# Altium PCB Street_light_driver_30W.PcbDoc
Units mm, origin at the board's own origin, x right, y up, seen from the top; angles counter-clockwise.
Board outline 30 x 124 mm, 2 copper layers (Top Layer, Bottom Layer); 27 components, 14 nets, 67 pads, 0 vias.
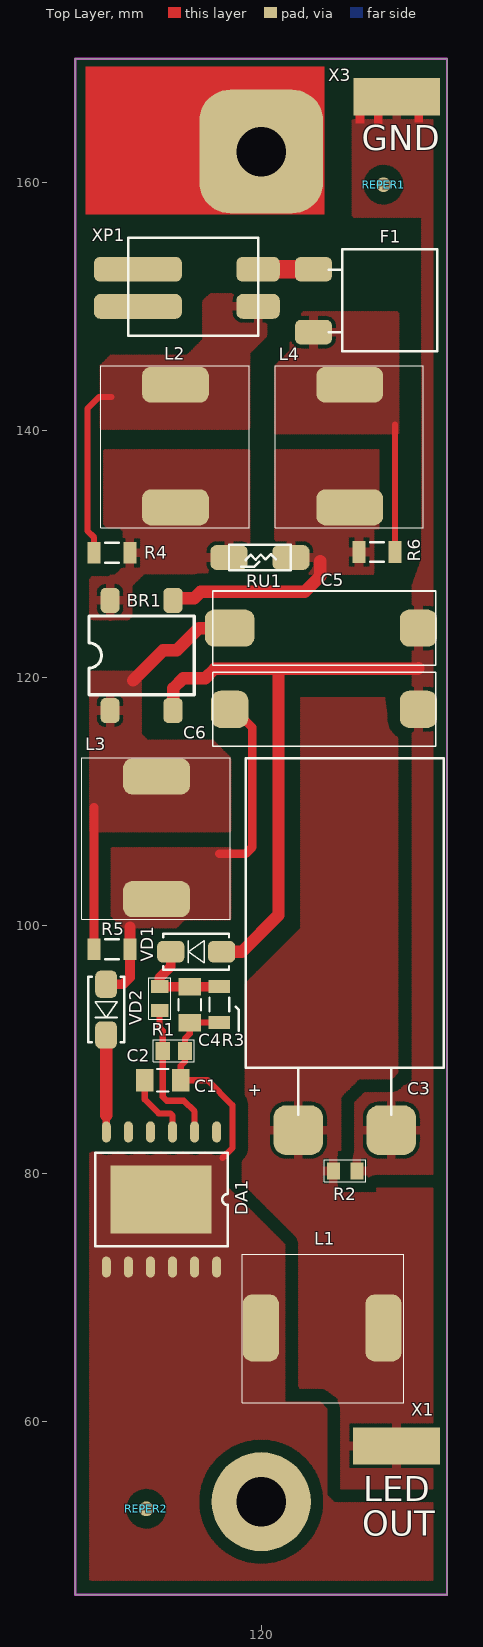
[diagram p0: Top Layer view]
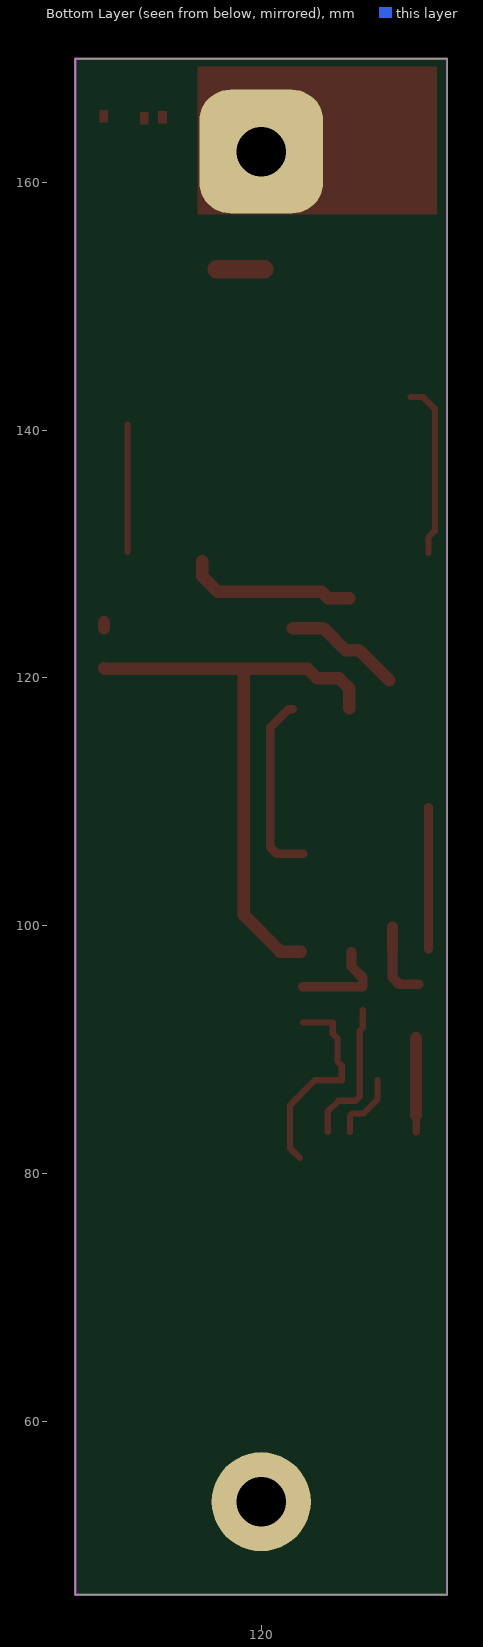
[diagram p1: Bottom Layer view, seen from below]

## Layer stack, top to bottom
Top Solder: solder mask 0.0102, Solder Resist, Dk 3.5
Top Layer: signal copper 0.0356
Dielectric 1: dielectric 0.32, FR-4, Dk 4.8
Bottom Layer: signal copper 0.0356
Bottom Solder: solder mask 0.0102, Solder Resist, Dk 3.5

## Board outline
105,46 135,46 135,170 105,170

## Design rules (kind name [scope] priority, off if disabled: settings)
Clearance Clearance_1 [InPolygon] p1: gap=1
Clearance [All] p2: gap=0.3
PolygonConnect PolygonConnect_1 [InComponent('DA1') OR InComponent('L1') OR InComponent('L2') OR InComponent('L3') OR InComponent('L4')] p1: connectstyle=Direct reliefconductorwidth=0.254 reliefentries=4 polygonreliefangle="90 Angle" airgapwidth=0.254
PolygonConnect [All] p2: connectstyle=Relief reliefconductorwidth=0.7 reliefentries=4 polygonreliefangle="90 Angle" airgapwidth=0.3
RoutingVias [All] p1: holewidth=0.711 width=1.27 viastyle="Through Hole" minholewidth=0.711 minwidth=1.27 maxholewidth=0.711 maxwidth=1.27
SolderMaskExpansion [All] p1: expansion=0.102
Width [All] p1: maxlimit=3 minlimit=0.2 preferedwidth=0.5
30 further rules are at their usual default settings.

## Classes and differential pairs
component class ICS: C1 C2 C3 C4 DA1 L1 R1 R2 R3 VD1 X1 X3
component class Main: BR1 C5 C6 F1 L2 L3 L4 R4 R5 R6 REPER1 REPER2 RU1 VD2 XP1

## Components (designator, comment, footprint, x,y, rotation, side; value= is the part's Value field where it differs from the comment)
BR1 "DF10S" SDIP 107.8,117.375 r180 top
C1 "10uF" CC1206 112.05,87.525 r180 top
C2 "1uF" CC0805 112.95,89.9 r0 top
C3 "470uFx100V" CAP_7.5_SMD_2 127.05,101.225 r0 top
C4 "10uF" CC1206 114.225,93.625 r270 top
C5 "100nFx630V" CAP_630V_SMD#1 125.275,124.1 r180 top
C6 "100nFx630V" CAP_630V_SMD#2 125.275,117.55 r180 top
DA1 "LNK460KG" eSOP-12 111.85,77.675 r270 top
F1 "*" "Fuse Belfuse" 124.2,150.55 r270 top
L1 "CDRH129HF-331MC" IND_CDRH129 125.55,67.675 r270 top
L2 "CDRH129HF-102MC" IND_CDRH129 113.225,138.1 r180 top
L3 "CDRH129HF-102MC" IND_CDRH129 111.7,106.475 r180 top
L4 "CDRH129HF-102MC" IND_CDRH129 127.3,138.1 r180 top
R1 "3k3" RC0805 111.8,94.125 r90 top
R2 "100k" RC0805 126.775,80.2 r180 top
R3 "1E2" RC1206 116.625,93.625 r270 top
R4 "3k3" RC1206 107.95,130.1 r0 top
R5 "3k6" RC1206 107.95,98.1 r0 top
R6 "3k3" RC1206 129.35,130.175 r180 top
REPER1 "REPER1.2" REPER1.2 129.875,159.825 r90 top
REPER2 "REPER1.2" REPER1.2 110.725,52.925 r90 top
RU1 "KLS6-07D" Varistor_7mm_SMD 120.025,129.8 r270 top
VD1 "ES1J" SMA 114.75,97.9 r180 top
VD2 "ES1J" SMA 107.475,93.225 r270 top
X1 "PIN_7x3mm_SMD" PIN_7x3mm_SMD 130.925,58 r0 top
X3 "PIN_7x3mm_SMD" PIN_7x3mm_SMD 130.95,166.925 r0 top
XP1 "*" "Poke-In 2pin" 110.05,153 r0 top

## Footprints (in the part's own frame and the unit in brackets; to place one, negate y for a bottom-side part, rotate by r counter-clockwise, add the part's x,y. Pads: shape width x height; smd on the part's side, far side on the other; paste and mask are expansions set on the pad)
CAP_7.5_SMD_2 [mm]
  rrect50% 4x4 smd: 1(3.45,-17.725) 2(-4.05,-17.725)
  silkscreen extent -8.3,-16.47 7.7,12.3
CAP_630V_SMD#1 [mm]
  rrect50% 3x3 smd: 1(-7.42,0.075)
  rrect50% 4x3 smd: 2(7.82,0.075)
  silkscreen extent -8.8,-2.92 9.2,3.08
CAP_630V_SMD#2 [mm]
  rrect50% 3x3 smd: 1(-7.42,0.075) 2(7.82,0.075)
  silkscreen extent -8.8,-2.92 9.2,3.08
CC0805 [mm]
  rect 1.15x1.45 smd paste-25.4: 1(-0.9,0) 2(0.9,0)
  silkscreen extent -1.65,-0.9 1.65,0.9
CC1206 [mm]
  rect 1.4x1.8 smd paste-25.4: 1(-1.45,0) 2(1.45,0)
  silkscreen extent -0.45,-0.9 0.45,0.9
eSOP-12 [mm]
  oval 1.7x0.71 smd: 1(-5.675,4.55) 2(-5.675,2.77) 3(-5.675,0.99) 4(-5.675,-0.79) 5(-5.675,-2.57) 6(-5.675,-4.35) 7(5.225,-4.35) 8(5.225,-2.57) 9(5.225,-0.79) 10(5.225,0.99) 11(5.225,2.77) 12(5.225,4.55)
  rect 5.51x8.15 smd: 13(-0.225,0.075)
  silkscreen extent -3.99,-5.24 3.54,5.44, body extent -4,-5.25 3.52,5.45, height 2.3
"Fuse Belfuse" [mm]
  rrect50% 2x3 smd: 1(-2.45,0.025) 2(2.63,0.025)
  silkscreen extent -4.08,1.25 4.18,10.02
IND_CDRH129 [mm]
  rrect50% 5.4x2.9 smd: 1(0.15,-5.575) 2(0.15,4.325)
  silkscreen extent -5.8,-7.1 6.17,5.95
PIN_7x3mm_SMD [mm]
  rect 7x3 smd: 1(0,0)
"Poke-In 2pin" [mm]
  rrect50% 7.1x2 smd: 1(0,0) 2(0,-3)
  rrect50% 3.5x2 smd: 3(9.7,-3) 4(9.7,0)
  silkscreen extent -0.77,-5.38 9.72,2.53
RC0805 [mm]
  rect 1.05x1.4 smd paste-25.4: 1(-0.95,0) 2(0.95,0)
  silkscreen extent -1.67,-0.89 1.67,0.89
RC1206 [mm]
  rect 1.05x1.75 smd paste-25.4: 1(-1.45,0) 2(1.45,0)
  silkscreen extent -0.55,-0.8 0.55,0.8
REPER1.2 [mm]
  round 1.2 smd paste-25.4 mask-25.4: 1(0,0)
  Top Layer pour cut-out: -1.2,-1.2 1.2,-1.2 1.2,1.2 -1.2,1.2
SDIP [mil]
  rrect50% 60x80 smd: 1(0,0) 2(-200,0) 3(-200,-350) 4(0,-350)
  silkscreen extent -268,-300 68,-50
SMA [mm]
  rrect50% 2.2x1.75 smd: 1(-2.05,0) 2(2.05,0)
  silkscreen extent -2.65,-1.45 2.65,1.45
Varistor_7mm_SMD [mm]
  rrect50% 2x3 smd: 1(0.075,2.375) 2(0.075,-2.625)
  silkscreen extent -0.95,-2.63 1.1,2.37

## Part data
C1 C4: library part CC1206, "CC1206"
C2: library part CC0805, "CC0805"
C3: library part CAP_16x25
C5 C6: library part Cap_HV
F1: library part "Fuse Belufse"
L1 L2 L3 L4: library part CDRH129
R1 R2: library part RC0805, "RC0805"
R3 R4 R5 R6: library part RC1206, "RC1206"
VD1 VD2: library part SS14, "Schottky Rectifier"
XP1: library part "Poke-IN 2Pin"

## Free pads (board coordinates)
  round 8 hole 4 unplated: 0(120,53.5)
  rrect50% 10x10 hole 4 unplated: 0(120,162.5)

## Nets (pads, with @x,y where several pads share a name; then routed paths per layer and width w, separated by ;. In a path a pad name is that pad's centre, name@x,y a point inside that pad or via, vN(x,y) a via of type N, cw(c..) or ccw(c..) an arc to the next point about the centre after c; other vN are vias at no path point)
GND: BR1.2 C3.1 C5.1 C6.1 R2.1 VD1.1 X3.1 | length 48.2
  Top Layer w1: BR1.2@112.9,117.56 112.9,119.175 113.7,119.975 115.475,119.975 116.25,120.75 132.645,120.75 132.695,120.8 ; VD1.1 118.45,97.9 121.4,100.85 121.4,120.625 ; C5.1 C5.1@132.695,124.5
NetBR1_1: BR1.1 C5.2 L3.1 R5.1 | length 21
  Top Layer w0.7: R5.1 106.5,109.575
  Top Layer w1: 109.65,119.8 112.075,122.225 113.175,122.225 114.975,124.025 C5.2
NetBR1_3: BR1.3 L4.2 R6.2 RU1.1 | length 13.8
  Top Layer w1: BR1.3@112.9,126.45 114.6,126.45 115.1,126.95 123.5,126.95 124.775,128.225 124.775,129.45
NetBR1_4: BR1.4 L2.2 R4.2 RU1.2
NetC1_1: C1.1 C2.2 C4.2 DA1.7 DA1.8 DA1.9 DA1.10 DA1.11 DA1.12 DA1.13 L1.1 R3.2 | length 17
  Top Layer w0.5: R3.2 C4.2 114.225,91.275 113.85,90.9 C2.2 113.85,89.05 113.5,88.7 C1.1 115.675,87.525 117.675,85.525 117.675,82.05 116.875,81.25
NetC1_2: C1.2 DA1.3 | length 5.6
  Top Layer w0.5: C1.2 110.6,85.975 111.725,84.85 112.65,84.85 112.84,84.66 DA1.3
NetC2_1: C2.1 DA1.2 R1.1 | length 11.8
  Top Layer w0.5: R1.1 111.8,91.775 112.05,91.525 C2.1 112.05,86.2 112.375,85.875 113.75,85.875 114.62,85.005 DA1.2
NetC3_2: C3.2 L1.2 R2.2 X1.1
NetC4_1: C4.1 R1.2 R3.1 VD1.2 | length 8
  Top Layer w0.8: VD1.2 112.7,96.7 111.8,95.8 R1.2 C4.1 R3.1
NetC6_2: C6.2 L3.2 R5.2 VD2.1 | length 21.4
  Top Layer w0.7: 116.6,105.8 118.75,105.8 119.275,106.325 119.275,116 117.8,117.475 C6.2
  Top Layer w0.8: VD2.1@107.3,95.275 108.85,95.275 109.4,95.825 R5.2
  Top Layer w0.9: R5.2 109.4,99.875
NetDA1_6: DA1.6 VD2.2 | length 8.6
  Top Layer w0.6: DA1.6 107.5,85.75
  Top Layer w1: 107.5,84.7 VD2.2@107.5,90.9
NetF1_1: F1.1 XP1.4 | length 3.8
  Top Layer w1.5: XP1.4 F1.1@123.6,153
NetF1_2: F1.2 L4.1 R6.1 | length 10.3
  Top Layer w0.5: R6.1 130.8,140.45
NetL2_1: L2.1 R4.1 XP1.3 | length 14.2
  Top Layer w0.5: R4.1 106.5,131.35 105.975,131.875 105.975,141.75 106.9,142.675 107.925,142.675
pads on no net: DA1.1 DA1.4 DA1.5 REPER1.1 REPER2.1 XP1.1 XP1.2

## Polygon pours and split planes (outlines as drawn)
NetF1_2 on Top Layer "NETF1_2_L01_P000" (hatched 90Degree grid 0.15 track 0.2, remove dead copper, pour order 0): 122.375,148.25 122.375,146.3 122.275,146.3 121.175,145.2 121.125,145.15 121.125,139.75 131.05,139.75 131.05,141.425 131.05,146.3 131.05,148.675 131.05,149.525 123.4,149.525
NetL2_1 on Top Layer "NETL2_1_L01_P002" (hatched 90Degree grid 0.15 track 0.2, remove dead copper, pour order 2): 120.425,150.975 115.9,150.975 115.4,150.475 115.325,150.4 115.325,147.65 115.325,147.3 114.5,146.475 114.025,146 109.175,146 107.85,146 107.05,145.2 107.05,140.875 107.05,140.125 119.025,140.125 119.025,145.2 119.025,146.25 120.425,147.65 120.425,149.8
NetBR1_4 on Top Layer "NETBR1_4_L01_P004" (hatched 90Degree grid 0.15 track 0.2, remove dead copper, pour order 4): 107.05,138.375 119.025,138.375 119.025,132.15 119.025,129.1 118.375,128.45 114.95,128.45 110.5,128.45 109.75,127.7 109.5,127.45 109.5,125.775 109.5,125 109.25,124.75 106.75,124.75 106.375,124.75 105.9,125.225 105.9,127.15 105.9,127.7 106.375,128.175 106.45,128.25 107.825,128.25 108.225,128.25 108.775,128.8 108.9,128.925 108.9,130.375 108.9,131.875 108.625,132.15 108.6,132.175 107.05,132.175
NetBR1_3 on Top Layer "NETBR1_3_L01_P006" (hatched 90Degree grid 0.15 track 0.2, remove dead copper, pour order 6): 121.125,138.375 121.125,128.9 121.625,128.4 123.475,128.4 129.05,128.4 129.05,128.975 129.05,132.1 129.625,132.1 129.625,138.375
GND on Top Layer "GND_L01_P008" (hatched 90Degree grid 0.15 track 0.2, remove dead copper, pour order 8): 127.375,169.625 135,169.625 135,157.525 135,157.25 128.325,157.25 127.375,157.25
NetBR1_1 on Top Layer "NETBR1_1_L01_P010" (hatched 90Degree grid 0.15 track 0.2, remove dead copper, pour order 10): 105.525,112.925 105.525,115.8 105.525,119.925 106.1,120.5 109.025,120.5 109.675,120.5 110,120.175 110.275,119.9 110.275,118.225 110.275,115.45 110.625,115.1 110.8,114.925 112.675,114.925 116.1,114.925 117.475,113.55 117.5,113.525 117.5,107.625 105.525,107.625
NetC6_2 on Top Layer "NETC6_2_L01_P012" (hatched 90Degree grid 0.15 track 0.2, remove dead copper, pour order 12): 108.875,99.875 108.95,99.875 108.875,99.875 107.75,101 107.75,104.275 107.75,106.25 110.475,106.25 117.5,106.25 117.5,100.525 113.775,100.525 113.125,99.875 110.25,99.875 109.175,99.875
NetC1_1 on Top Layer "NETC1_1_L01_P014" (hatched 90Degree grid 0.15 track 0.2, remove dead copper, pour order 14): 107.15,81.675 105.5,81.675 105.5,73.925 105.5,46.35 134.25,46.35 134.25,48.525 134.25,53.375 132.75,53.375 125.9,53.375 125.25,54.025 125.25,57.65 125.25,60.975 124.75,61.475 124.725,61.5 121.875,61.5 121.875,74.225 121.7,74.4 117.3,78.8 117.3,81.675
NetC3_2 on Top Layer "NETC3_2_L01_P016" (hatched 90Degree grid 0.15 track 0.2, remove dead copper, pour order 16): 135,54.25 126.25,54.25 126.25,55.025 126.25,61.875 125.35,62.5 122.875,62.5 122.875,74.5 119.3,78.075 117.875,79.5 117.875,80.5 117.875,81.125 118.25,81.5 118.75,82 118.75,82.65 118.75,95.275 120.225,96.75 123.25,99.775 123.25,103.575 123.25,118.375 126.1,118.375 129.25,118.375 129.925,118.375 130.125,116.8 131,115.625 131,115.15 131,105.2 131,102.5 131,93.45 131,88.175 130.5,87.675 129.2,87.675 127.875,87.675 126.95,86.75 126.375,86.175 126.375,81.8 126.375,79.725 126.375,79.075 126.675,78.775 129.625,78.775 135,78.775
GND on Top Layer "GND_L01_P018" (hatched 90Degree grid 0.15 track 0.2, remove dead copper, pour order 18): 127.2,80.275 127.2,86.025 128.275,87.1 131.175,87.1 131.8,87.1 132.25,87.55 132.225,87.575 132.225,120.075 132.225,127.425 133,129.6 133,130.825 133,134.225 133,157.25 133.5,157.25 135,157.25 135,79.5 134.975,79.475 127.2,79.475

## Keep-outs
Keep-Out Layer:
  the board outline again, w0.2

## Other copper
Top Layer:
  rectangle net GND: 132.375,164.85 133.075,165.85
  rectangle net GND: 129.1,164.7 129.8,165.7
  rectangle net GND: 127.625,164.775 128.325,165.775
  rectangle: 105.8,157.4 125.125,169.375

## Silkscreen, mask and mechanical layers (free items; w line width, h text height)
Top Overlay:
  lines w0.2: 117.925,93.475 118.2,93.2 118.2,91.525
  text "GND" at 128.125,162.625 h2
  text "LED" at 128.225,53.55 h2
  text "OUT" at 128.175,50.75 h2
Top Solder:
  rectangle: 105.85,157.4 125.125,169.375

## Dimensions
105,170 to 135,170 on Mechanical 1
135,170 to 135,46 on Mechanical 1

## Text inside footprints (layer, text, board x,y; h text height)
C3: Top Overlay "+" at 118.925,86.275 h1